# EAGLE board wireless_triac (EAGLE 6.1)
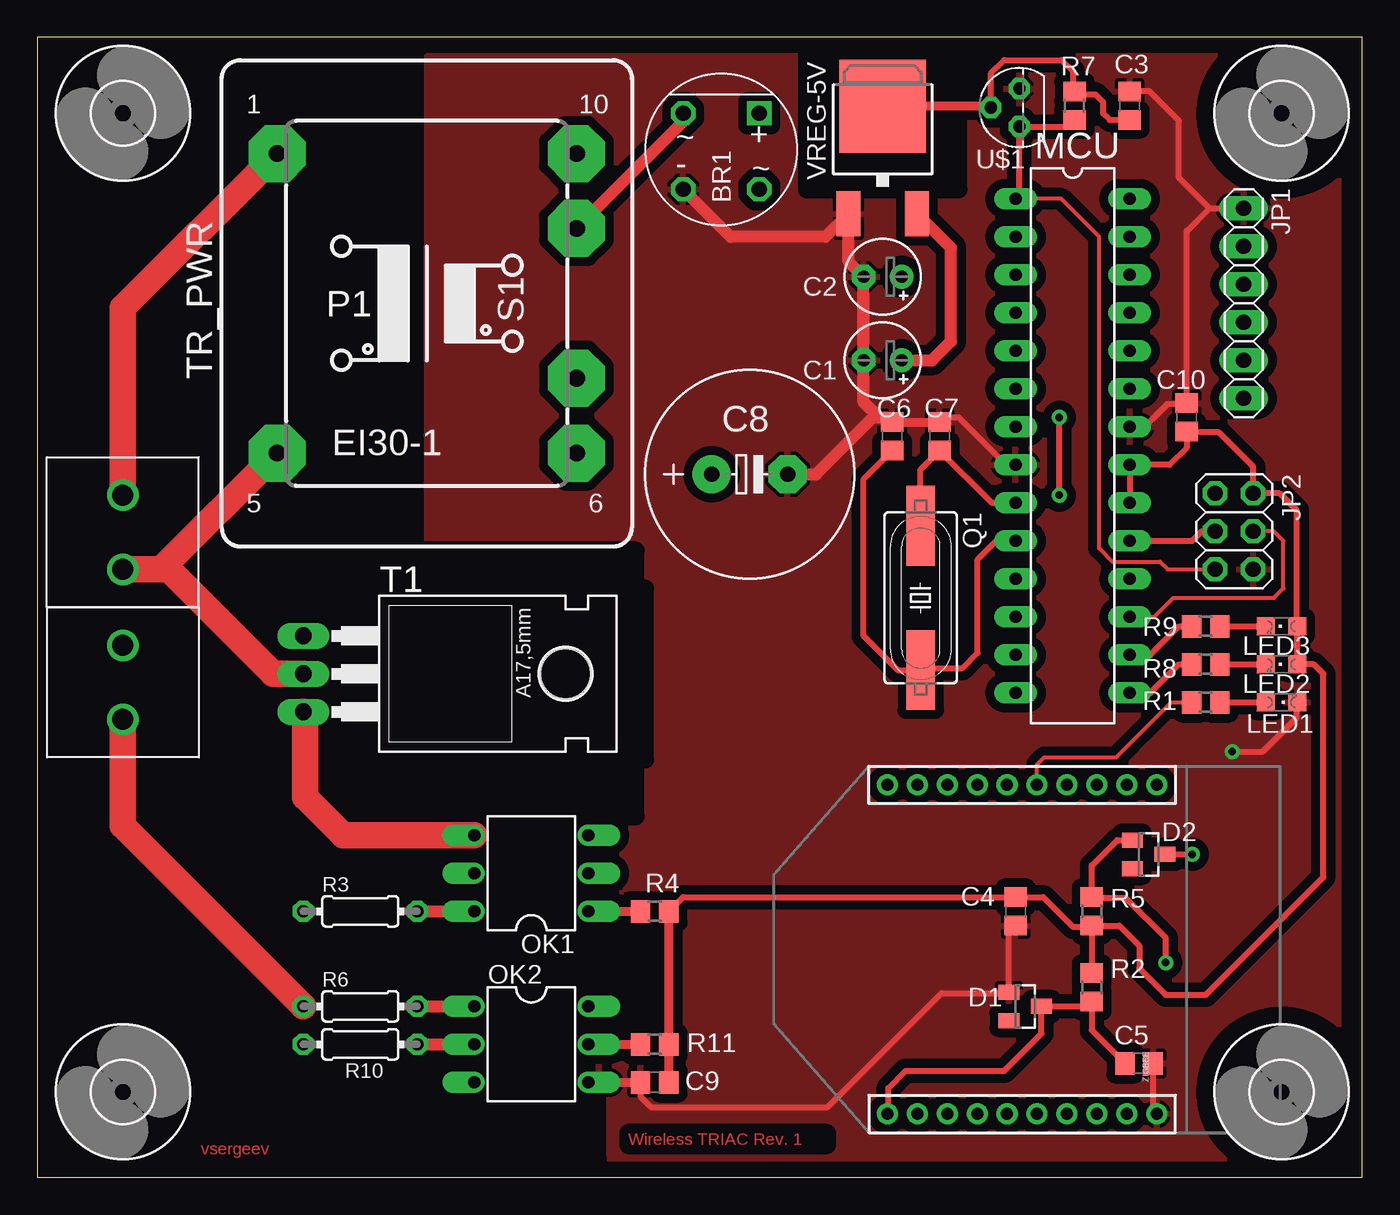
[diagram p0: board, top side]
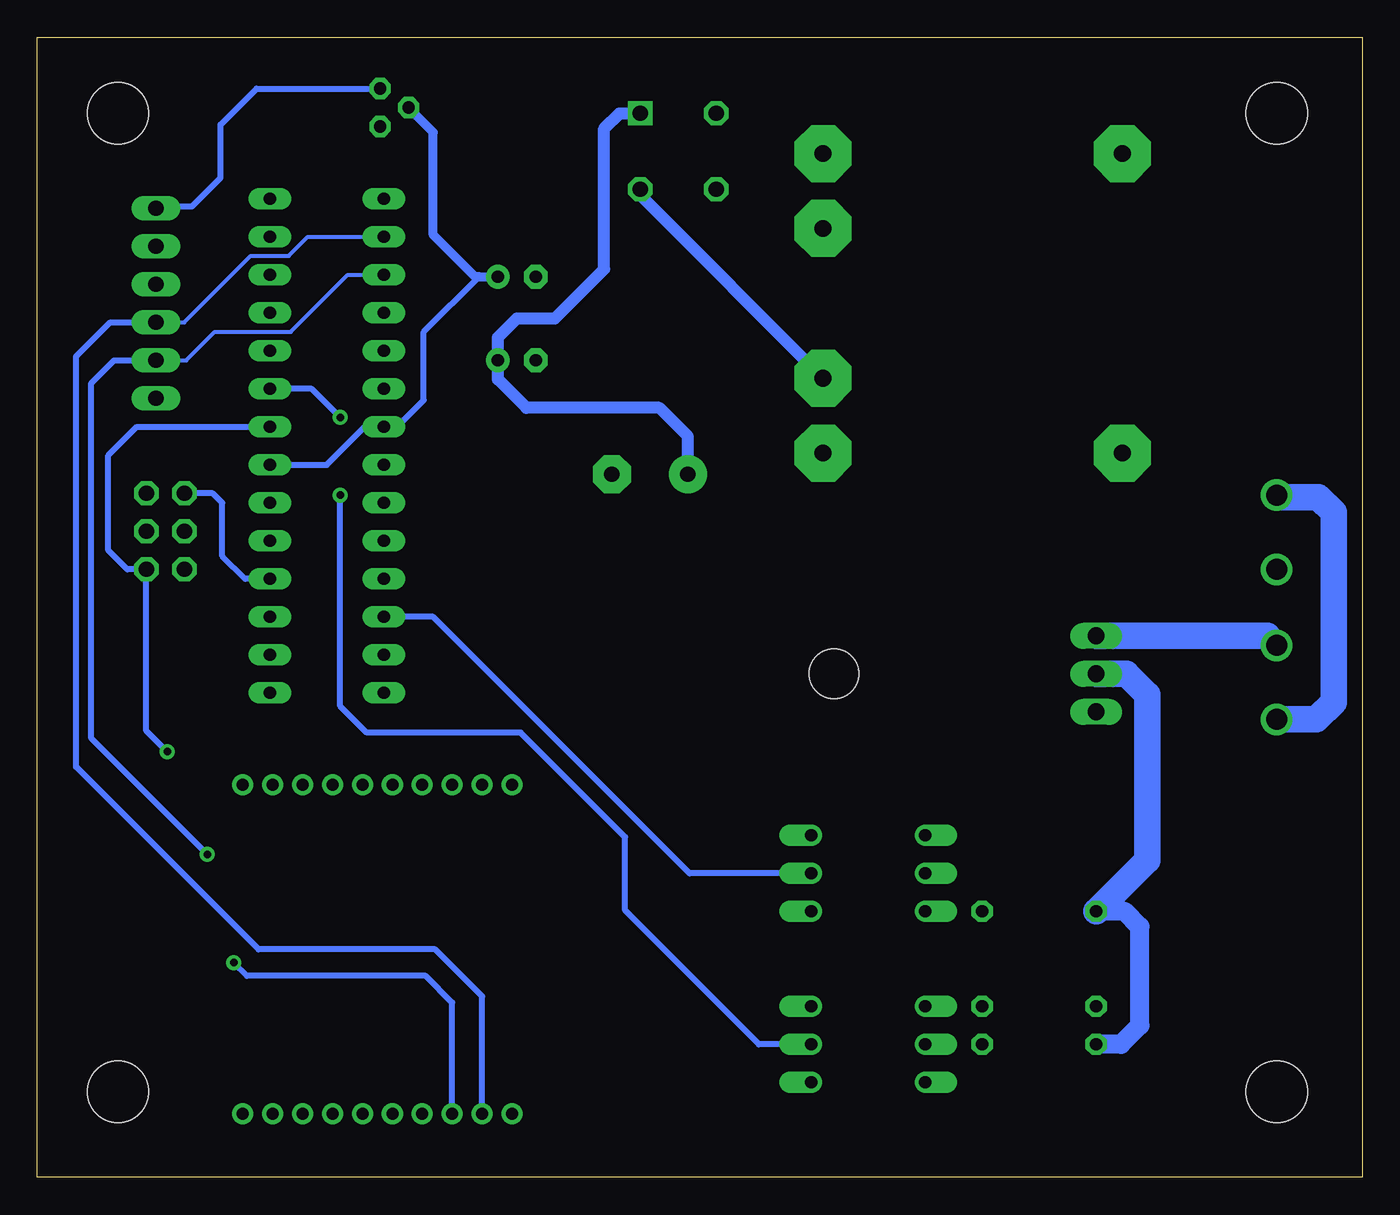
[diagram p1: board, bottom side, seen from below]

Size 88.57 x 76.19 mm. Coordinates in mm from the lower left corner, seen from the top.
Outline: 0,0 88.57,0 88.57,76.19 0,76.19 0,0
Copper layers (1*16): Top 0.0356mm / dielectric 1.5011mm / Bottom 0.0356mm
Design rules: minimum track width 8mil, minimum drill 19mil, track to track 8mil, track to pad 8mil, pad to pad 7mil, via to via 8mil, smd to smd 8mil, copper to edge 10mil, drill to drill 8mil, minimum pad ring 12mil, minimum via ring 10mil, stop-mask expansion 4mil, vias tented up to drill 25mil, thermal gap 10mil
tRestrict: area 51.4,66 to 61.6,74.9; area 22.9,27.9 to 40.6,39.4; area 29.8,16.5 to 36.2,24.1; area 29.8,5.1 to 36.2,12.7; area 26,24.1 to 40,27.9; area 26,1.3 to 37.5,6.4; area 26,39.4 to 40,41.9

## Footprints (pad centres in the part's own frame; a part is rotated, then mirrored left to right if it is on the bottom)
WOG = drill 1.016 square: + 2.54,2.54 | drill 1.016 octagon: - -2.54,-2.54; AC1 -2.54,2.54; AC2 2.54,-2.54
E2,5-5 = drill 0.813 pad 1.6: + -1.27,0 | drill 0.813 pad 1.6 octagon: - 1.27,0
C0805 = smd 1.3 x 1.5: 1 -0.95,0; 2 0.95,0
E5-13 = drill 1.016 pad 2.54: + -2.54,0 | drill 1.016 pad 2.54 octagon: - 2.54,0
SOT23 = smd 1 x 1.4: 1 -0.95,-1.1; 2 0.95,-1.1; 3 0,1.1
4,1 = hole 4.1: 0,0
1X06 = drill 1.016 long: 1 -6.35,0; 2 -3.81,0; 3 -1.27,0; 4 1.27,0; 5 3.81,0; 6 6.35,0
2X03 = drill 1.016 octagon: 1 -2.54,-1.27; 2 -2.54,1.27; 3 0,-1.27; 4 0,1.27; 5 2.54,-1.27; 6 2.54,1.27
CHIPLED_0805 = smd 1.2 x 1.2: A 0,-1.05; C 0,1.05
DIL28-3 = drill 0.813 long: 1 -16.51,-3.81; 2 -13.97,-3.81; 3 -11.43,-3.81; 4 -8.89,-3.81; 5 -6.35,-3.81; 6 -3.81,-3.81; 7 -1.27,-3.81; 8 1.27,-3.81; 9 3.81,-3.81; 10 6.35,-3.81; 11 8.89,-3.81; 12 11.43,-3.81; 13 13.97,-3.81; 14 16.51,-3.81; 15 16.51,3.81; 16 13.97,3.81; 17 11.43,3.81; 18 8.89,3.81; 19 6.35,3.81; 20 3.81,3.81; 21 1.27,3.81; 22 -1.27,3.81; 23 -3.81,3.81; 24 -6.35,3.81; 25 -8.89,3.81; 26 -11.43,3.81; 27 -13.97,3.81; 28 -16.51,3.81
DIL06 = drill 0.813 offset: 1 -2.54,-3.81; 2 0,-3.81; 3 2.54,-3.81; 4 2.54,3.81; 5 0,3.81; 6 -2.54,3.81
HC49UP = smd 5.334 x 1.93: 1 -4.826,0; 2 4.826,0
R0805 = smd 1.3 x 1.5: 1 -0.95,0; 2 0.95,0
0204/7 = drill 0.813 octagon: 1 -3.81,0; 2 3.81,0
TO220AB = drill 1.118 long: 1 -2.54,-6.35; 2 0,-6.35; 3 2.54,-6.35 | hole 3.302: 0,11.176
TERMINAL-BLOCK = drill 1.4: P1 -2.413,0; P2 2.54,0
EI30-1 = drill 1.118 pad 3.81 octagon: 1 -10.008,10.008; 5 -10.008,-10.008; 6 10.008,-10.008; 7 10.008,-5.004; 9 10.008,5.004; 10 10.008,10.008
TO92 = drill 0.813 octagon: 1 -1.27,0; 2 0,1.905; 3 1.27,0
DPACK = smd 1.6 x 3: 1 -2.28,-4.8; 3 2.28,-4.8 | smd 5.8 x 6.2: 4 0,2.38
XBEE-1 = drill 0.8: 1 -11,20; 2 -11,18; 3 -11,16; 4 -11,14; 5 -11,12; 6 -11,10; 7 -11,8; 8 -11,6; 9 -11,4; 10 -11,2; 11 11,2; 12 11,4; 13 11,6; 14 11,8; 15 11,10; 16 11,12; 17 11,14; 18 11,16; 19 11,18; 20 11,20

## Placement (x,y rotation side)
BR1  W04G  [WOG]  45.72,68.58 0 top
C1  10uF  [E2,5-5]  56.52,54.61 180 top
C2  10uF  [E2,5-5]  56.52,60.2 180 top
C3  100nF  [C0805]  73.02,71.63 90 top
C4  100nF  [C0805]  65.41,17.78 270 top
C5  100nF  [C0805]  73.66,7.62 0 top
C6  [C0805]  57.15,49.53 90 top
C7  [C0805]  60.33,49.53 90 top
C8  1000uF  [E5-13]  47.62,46.99 0 top
C9  100nF  [C0805]  41.27,6.35 180 top
C10  100nF  [C0805]  76.83,50.8 90 top
D1  3.3V  [SOT23]  66.04,11.43 270 top
D2  BAS40  [SOT23]  74.3,21.59 270 top
H1  MOUNT-HOLE4.1  [4,1]  83.18,5.72 0 top
H2  MOUNT-HOLE4.1  [4,1]  83.18,71.12 0 top
H3  MOUNT-HOLE4.1  [4,1]  5.71,71.12 0 top
H4  MOUNT-HOLE4.1  [4,1]  5.71,5.72 0 top
JP1  MCU-UART  [1X06]  80.64,58.42 270 top
JP2  MCU-ICSP  [2X03]  80.01,43.18 270 top
LED1  [CHIPLED_0805]  83.18,31.75 270 top
LED2  [CHIPLED_0805]  83.18,34.29 90 top
LED3  [CHIPLED_0805]  83.18,36.83 90 top
MCU  ATMEGA48  [DIL28-3]  69.21,48.9 270 top
OK1  MOC3023M  [DIL06]  33.02,20.32 90 top
OK2  H11AA1M  [DIL06]  33.02,8.89 270 top
Q1  [HC49UP]  59.05,38.73 270 top
R1  [R0805]  78.1,31.75 0 top
R2  34  [R0805]  70.48,12.7 270 top
R3  180  [0204/7]  21.59,17.78 0 top
R4  [R0805]  41.27,17.78 0 top
R5  10K  [R0805]  70.48,17.78 270 top
R6  15K  [0204/7]  21.59,11.43 0 top
R7  10K  [R0805]  69.34,71.63 90 top
R8  [R0805]  78.1,34.29 180 top
R9  [R0805]  78.1,36.83 180 top
R10  15K  [0204/7]  21.59,8.89 0 top
R11  10K  [R0805]  41.27,8.89 0 top
T1  BT136  [TO220AB]  24.13,33.66 270 top
T_IN  SCREW-TERMINAL-BLOCK  [TERMINAL-BLOCK]  5.71,43.18 270 top
T_OUT  SCREW-TERMINAL-BLOCK  [TERMINAL-BLOCK]  5.71,33.02 90 top
TR_PWR  [EI30-1]  26.04,58.42 0 top
U$1  MCP130'  [TO92]  65.66,71.5 90 top
VREG-5V  LD1086  [DPACK]  56.52,69.21 0 top
ZIGBEE  XBEE-1B1  [XBEE-1]  76.83,15.24 90 top

## Library data of the parts
BR1 = dbridge
C1-C10 R1-R11 = rcl
D1 D2 = diode
H1-H4 = holes
JP1 JP2 = pinhead
LED1-LED3 = led
MCU = atmel-newmicros
OK1 OK2 = optocoupler
Q1 = crystal
T1 = triac
T_IN T_OUT = custom-screw-terminal
TR_PWR = trafo
U$1 = custom-reset-supervisor
VREG-5V = st-vregs
ZIGBEE = SparkFun

## Nets
+3V3: C5.1 D1.3 R2.2 ZIGBEE.1
+5V: C2.+ C3.1 C4.1 C9.1 C10.1 JP2.2 LED2.A LED3.A MCU.7 MCU.20 MCU.21 R2.1 R4.2 R5.2 R7.2 R11.2 U$1.2 VREG-5V.4
DC+: BR1.+ C1.+ C8.+ VREG-5V.3
GND: BR1.- C1.- C2.- C3.2 C4.2 C5.2 C6.2 C7.2 C8.- C9.2 C10.2 D1.1 JP1.1 JP2.6 LED1.C MCU.8 MCU.22 OK2.4 U$1.3 VREG-5V.1 ZIGBEE.10
MCU_MISO: JP2.1 MCU.18
MCU_MOSI: JP2.4 MCU.17
MCU_RESET: JP2.5 MCU.1 R7.1 U$1.1
MCU_SCK: JP2.3 MCU.19
MCU_TXD: D2.3 JP1.5 MCU.3
N$1: OK1.6 R3.2
N$2: BR1.AC1 TR_PWR.9
N$3: BR1.AC2 TR_PWR.7
N$4: C6.1 MCU.10 Q1.2
N$5: T1.1 T_OUT.P2
N$6: OK1.4 T1.3
N$7: OK1.1 R4.1
N$8: OK2.2 R10.2
N$9: OK2.1 R6.2
N$11: LED1.A R1.2
N$13: LED2.C R8.1
N$14: MCU.15 R8.2
N$15: C7.1 MCU.9 Q1.1
N$16: MCU.16 R9.2
N$17: LED3.C R9.1
N$18: R6.1 T_IN.P1 T_OUT.P1 TR_PWR.1
N$20: R3.1 R10.1 T1.2 T_IN.P2 TR_PWR.5
TRIAC_OUT: MCU.12 OK1.2
XBEE_LED: R1.1 ZIGBEE.15
XBEE_RX: D2.1 R5.1 ZIGBEE.3
XBEE_TX: JP1.4 MCU.2 ZIGBEE.2
ZERO_CROSS_DET: MCU.23 OK2.5 R11.1

## Tracks (layer width: path | path; a pad name or v marks a point on that pad's centre or on a via)
+3V3
  Top 0.406: C5.1 70.48,9.84 R2.2 70.16,11.43 D1.3 67.14,9.61 64.64,7.11 58.04,7.11 56.9,5.97 56.9,4.3 ZIGBEE.1
+5V
  Top 0.406: C3.1 71.69,70.68 71.25,71.12 71.25,71.88 70.74,72.39 69.53,72.39 R7.2 69.21,72.7 69.21,73.91 68.45,74.68 64.64,74.68 63.75,73.79 U$1.2 | MCU.20 MCU.21 75.69,47.62 76.83,48.77 C10.1 76.9,49.78 78.99,49.78 81.28,47.5 JP2.2 83.06,45.72 84.2,44.58 84.2,36.86 LED3.A LED2.A 85.34,34.29 85.98,33.66 85.98,20.07 78.1,12.19 75.44,12.19 73.66,13.97 73.66,15.49 72.32,16.83 R5.2 | R5.2 70.42,16.76 69.21,16.76 67.25,18.73 C4.1 43.18,18.73 R4.2 | R5.2 R2.1
  Top 0.61: C9.1 R11.2 R4.2 | VREG-5V.4 63.66,71.59 U$1.2
  Bottom 0.406: 59.05,60.2 62.74,56.52 62.74,51.94 64.52,50.16 MCU.7 66.67,50.16 69.21,47.62 MCU.21
  Bottom 0.61: C2.+ 59.05,60.2 59.31,60.2 62.1,62.99 62.1,69.85 U$1.2
DC+
  Top 0.813: C1.+ 59.82,54.61 61.09,55.88 61.09,62.12 VREG-5V.3
  Bottom 0.813: C8.+ 45.09,49.53 46.99,51.44 55.88,51.44 57.79,53.34 C1.+ 57.79,56.13 56.52,57.4 53.98,57.4 50.67,60.71 50.67,70.1 49.66,71.12 BR1.+
GND  (via drill 0.5)
  Top 0.406: MCU.8 64.77,47.62 61.59,50.8 60.65,50.8 C7.2 | C3.2 74.36,72.58 76.33,70.61 76.33,66.8 78.36,64.77 | 78.36,64.77 JP1.1 | 78.36,64.77 76.83,63.25 C10.2 76.77,51.69 75.56,51.69 74.04,50.16 MCU.22 | C4.2 64.94,16.37 D1.1 64.88,12.32 60.45,12.32 52.83,4.7 41.02,4.7 40.33,5.39 C9.2 | ZIGBEE.10 74.61,4.46 C5.2 | 84.33,31.75 LED1.C 84.2,31.72 84.2,30.73 81.91,28.45 v79.88,28.45
  Top 0.61: C6.2 C7.2 | OK2.4 C9.2
  Top 0.813: C8.- 52.07,46.99 55.88,50.8 56.26,50.8 | 56.26,50.8 56.83,50.8 C6.2 | 56.26,50.8 55.25,51.82 C1.- C2.- 54.23,61.21 VREG-5V.1 52.69,62.87 46.36,62.87 BR1.-
  Bottom 0.406: U$1.3 73.91,72.77 76.33,70.36 76.33,66.8 78.23,64.9 80.52,64.9 JP1.1 | v79.88,28.45 81.28,29.84 JP2.6 82.55,40.64 83.82,41.91 83.82,48.26 81.91,50.16 MCU.22
  pour Top (isolate 0.61): 86.99,1.27 86.99,74.93 26.04,74.93 26.04,1.27
MCU_MISO
  Bottom 0.406: JP2.1 76.83,45.72 76.2,45.09 76.2,41.53 74.68,40.01 MCU.18
MCU_MOSI
  Top 0.254: MCU.17 74.68,37.47 75.95,38.73 82.68,38.73 83.31,39.37 83.31,42.55 82.68,43.18 JP2.4
MCU_RESET
  Top 0.254: JP2.5 75.56,40.64 75.06,41.15 71.88,41.15 70.99,42.04 70.99,62.87 68.45,65.4 MCU.1
  Top 0.406: R7.1 68.89,70.23 U$1.1 65.66,65.66 MCU.1
MCU_SCK
  Top 0.406: MCU.19 77.22,42.55 77.85,43.18 JP2.3
MCU_TXD  (via drill 0.5)
  Top 0.406: D2.3 v77.22,21.59
  Bottom 0.254: MCU.3 67.82,60.33 71.63,56.52 76.71,56.52 78.61,54.61 JP1.5
  Bottom 0.406: JP1.5 83.44,54.61 84.96,53.09 84.96,29.34 v77.22,21.59
N$1
  Top 0.813: R3.2 OK1.6
N$2
  Top 0.813: TR_PWR.9 43.18,70.56 BR1.AC1
N$3
  Bottom 0.813: TR_PWR.7 48.26,65.63 BR1.AC2
N$4
  Top 0.406: C6.1 55.25,46.68 55.25,36.2 57.53,33.91 Q1.2 59.18,34.04 61.85,34.04 62.87,35.05 62.87,41.27 64.13,42.55 MCU.10
N$5
  Bottom 1.778: T_OUT.P2 6.35,36.2 T1.1
N$6
  Top 1.778: OK1.4 20.45,22.86 17.91,25.4 17.91,30.99 T1.3
N$7
  Top 0.61: OK1.1 R4.1
N$8
  Top 0.813: R10.2 OK2.2
N$9
  Top 0.813: R6.2 OK2.1
N$11
  Top 0.406: R1.2 LED1.A
N$13
  Top 0.406: R8.1 LED2.C
N$14
  Top 0.406: MCU.15 74.42,32.38 76.33,34.29 R8.2
N$15
  Top 0.406: Q1.1 59.05,47.31 C7.1 63.82,45.09 MCU.9
N$16
  Top 0.406: MCU.16 74.42,34.93 76.33,36.83 R9.2
N$17
  Top 0.406: R9.1 LED3.C
N$18
  Top 1.778: R6.1 5.71,23.5 T_OUT.P1 | T_IN.P1 5.71,58.12 TR_PWR.1
  Bottom 1.27: 5.59,45.47 T_IN.P1
  Bottom 1.778: T_OUT.P1 3.05,30.61 1.91,31.75 1.91,44.45 2.92,45.47 5.59,45.47
N$20
  Top 1.27: 8.76,40.64 T_IN.P2
  Top 1.778: T1.2 15.75,33.66 8.76,40.64 | T_IN.P2 8.26,40.64 TR_PWR.5
  Bottom 1.27: R3.1 15.88,17.78 14.86,16.76 14.86,10.16 16.13,8.89 R10.1
  Bottom 1.778: T1.2 15.75,33.66 14.35,32.26 14.35,21.21 R3.1
TRIAC_OUT
  Bottom 0.406: OK1.2 44.96,20.32 62.1,37.47 MCU.12
XBEE_LED
  Top 0.254: ZIGBEE.15 66.83,27.59 67.31,28.07 72.14,28.07 75.82,31.75 R1.1
XBEE_RX  (via drill 0.5)
  Top 0.406: D2.1 72.2,22.54 70.48,20.83 R5.1 70.55,18.67 72.77,18.67 75.44,16 v75.44,14.35
  Bottom 0.406: ZIGBEE.3 60.84,11.69 62.61,13.46 74.55,13.46 v75.44,14.35
XBEE_TX
  Bottom 0.254: MCU.2 70.48,62.87 71.75,61.6 74.3,61.6 78.74,57.15 JP1.4
  Bottom 0.406: JP1.4 83.69,57.15 85.98,54.86 85.98,27.43 73.79,15.24 61.98,15.24 58.84,12.1 ZIGBEE.2
ZERO_CROSS_DET  (via drill 0.5)
  Top 0.406: v68.33,45.59 v68.33,50.8
  Top 0.61: OK2.5 R11.1
  Bottom 0.406: v68.33,45.59 68.33,31.5 66.55,29.72 56.26,29.72 49.28,22.73 49.28,17.84 R11.1 OK2.5 | v68.33,50.8 70.23,52.7 MCU.23

## Text on the board
Top: Wireless TRIAC Rev. 1 | vsergeev